# Altium PCB PCB_MCP_41x_453x.PcbDoc
Units mm, origin at the board's own origin, x right, y up, seen from the top; angles counter-clockwise.
Board outline 22.54 x 20.32 mm, 2 copper layers (Top Layer, Bottom Layer); 13 components, 9 nets, 50 pads, 3 vias.
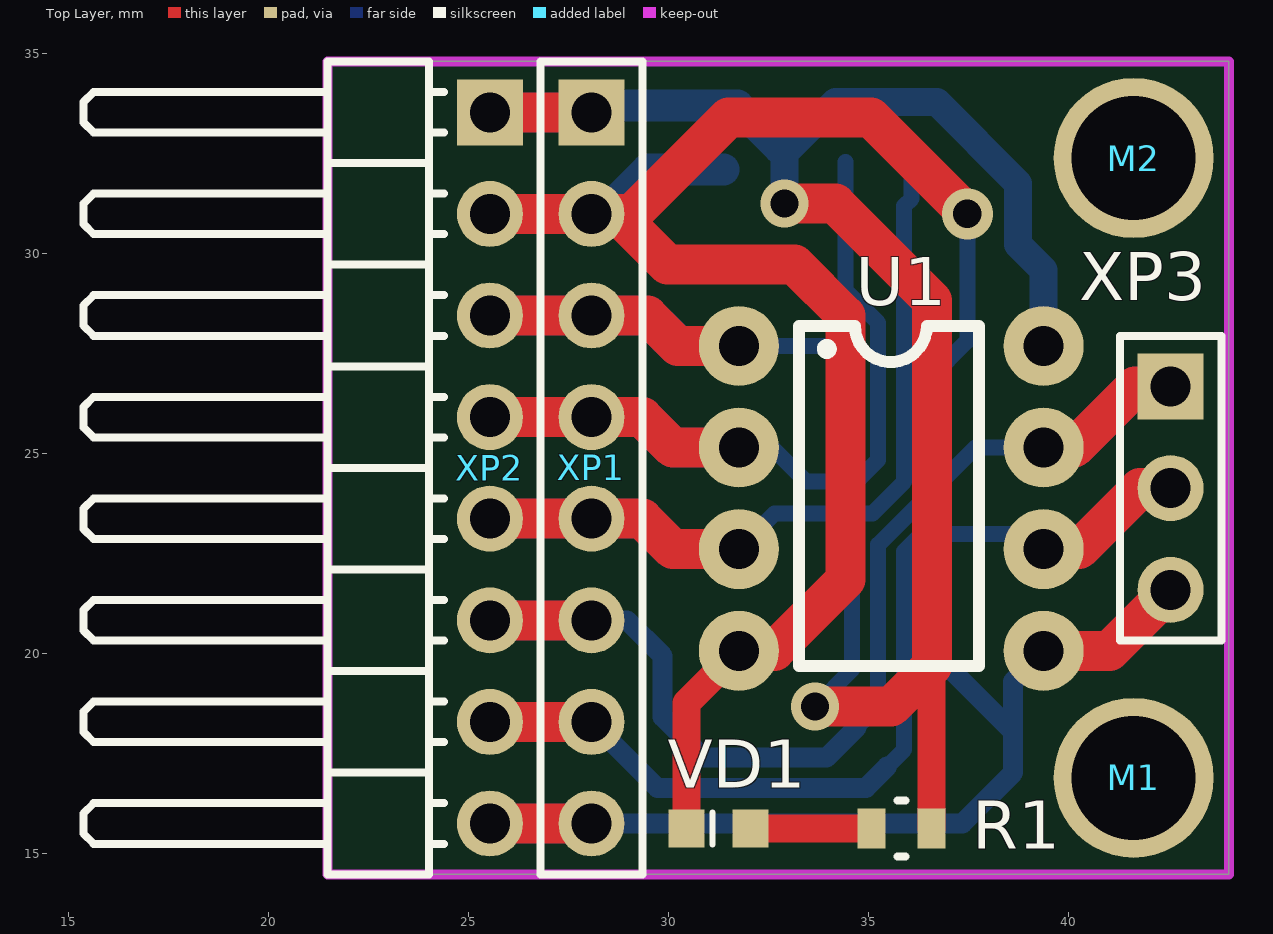
[diagram p0: Top Layer view]
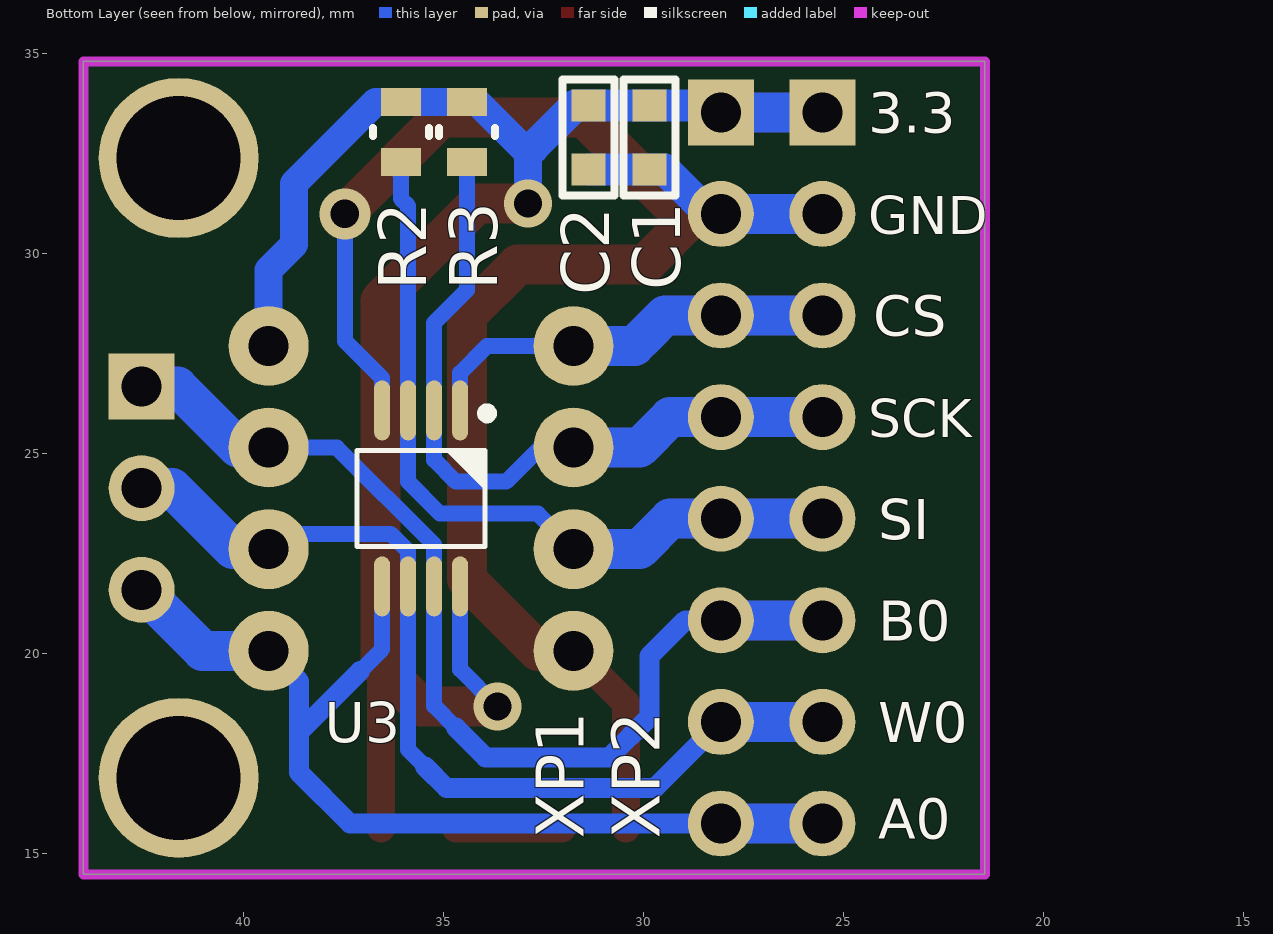
[diagram p1: Bottom Layer view, seen from below]

## Layer stack, top to bottom
Top Solder: solder mask 0.0102, Solder Resist, Dk 3.5
Top Layer: signal copper 0.0356
Dielectric 1: dielectric 0.32, FR-4, Dk 4.8
Bottom Layer: signal copper 0.0356
Bottom Solder: solder mask 0.0102, Solder Resist, Dk 3.5

## Board outline
21.463,14.478 21.463,34.798 44,34.798 44,14.478

## Design rules (kind name [scope] priority, off if disabled: settings)
Clearance [All] p1: gap=0.1 ignorepadtopadclearanceinfootprint=FALSE
HoleSize [All] p1: absolutevalues=TRUE maxlimit=5 minlimit=0.025 maxpercent=80.000 minpercent=20.000
HoleToHoleClearance [All] p1: gap=0.1 allowstackedmicrovias=TRUE
MinimumSolderMaskSliver [All] p1: minsoldermaskwidth=0.04
PolygonConnect [All] p1: connectstyle=Relief reliefconductorwidth=0.254 reliefentries=4 polygonreliefangle="90 Angle" airgapwidth=0.254
RoomDefinition SCH_MCP_41x_453x [InComponentClass('SCH_MCP_41x_453x')] p1: confinementstyle=ConfineIn formatcopy=TRUE lockcomponents=FALSE outline 182.499,26.162 186.436,26.162 186.436,28.829 182.499,28.829
RoutingVias [All] p1: holewidth=0.711 width=1.27 viastyle="Through Hole" minholewidth=0.711 minwidth=1.27 maxholewidth=0.711 maxwidth=1.27
SilkToSilkClearance [All] p1: silktosilkclearance=0.1
SilkToSolderMaskClearance [IsPad] p1: minsilkscreentomaskgap=0.1 clearancetoexposedcopper=TRUE
SolderMaskExpansion [All] p1: expansion=0.102
Width [All] p1: maxlimit=2 minlimit=0.254 preferedwidth=0.5
25 further rules are at their usual default settings.

## Components (designator, comment, footprint, x,y, rotation, side; value= is the part's Value field where it differs from the comment)
C1 "0.1uF" SMD0603-v3 29.845,32.893 r90 bottom
C2 "0.01uF" SMD0603-v3 31.369,32.893 r90 bottom
M1 "Mehanical_Pin" Mehanical_Pin 41.62,16.891 r0 top
M2 "Mehanical_Pin" Mehanical_Pin 41.62,32.385 r0 top
R1 "3.3k" SMD0603-v1 35.814,15.621 r0 top
R2 "4.7k" SMD0603-v1 36.068,33.032 r90 bottom
R3 "4.7k" SMD0603-v1 34.417,33.032 r90 bottom
U1 "MCP41xx_43xx" DIP-8_3D 31.75,27.686 r270 top locked
U3 "MCP4551" SOP65P490X109-8N 35.56,23.876 r270 bottom
VD1 "LED" LEDC1608X80N_G 31.242,15.621 r0 top
XP1 "PLS-08" PLS-08 28.067,33.528 r270 top
XP2 "PLS-08R" PLS-08R-LEFT 25.527,33.528 r270 top
XP3 "PLS-03" PLS-03 42.545,26.67 r270 top

## Footprints (in the part's own frame and the unit in brackets; to place one, negate y for a bottom-side part, rotate by r counter-clockwise, add the part's x,y. Pads: shape width x height; smd on the part's side, far side on the other; paste and mask are expansions set on the pad)
DIP-8_3D [mm] "Small Outline; 8 Leads; Body Width 3.9 mm; Pitch 1.27 mm"
  round 2 hole 1: 1(0,0) 2(2.54,0) 3(5.08,0) 4(7.62,0) 5(7.62,7.62) 6(5.08,7.62) 7(2.54,7.62) 8(0,7.62)
  silkscreen extent -0.5,1.5 8,6, body extent -1.14,-0.1 8.77,7.72, height 4.67
LEDC1608X80N_G [mm] "SMD LED GREEN"
  rect 0.9x0.95 smd: 1(-0.8,0) 2(0.8,0)
  silkscreen extent -0.15,-0.4 -0.15,0.4, body extent -0.9,-0.45 0.9,0.45, height 0.8
Mehanical_Pin [mm]
  round 4 hole 3.1: 0(0,0)
PLS-03 [mm] "Однорядный прямой штыревой соединитель типа PLS"
  rect 1.65x1.65 hole 1: 1(0,0)
  round 1.65 hole 1: 2(2.54,0) 3(5.08,0)
  silkscreen extent -1.27,-1.27 6.35,1.27, body extent -1.27,-1.27 6.35,1.27, height 8.64
PLS-08 [mm] "Однорядный прямой штыревой соединитель типа PLS"
  rect 1.65x1.65 hole 1: 1(0,0)
  round 1.65 hole 1: 2(2.54,0) 3(5.08,0) 4(7.62,0) 5(10.16,0) 6(12.7,0) 7(15.24,0) 8(17.78,0)
  silkscreen extent -1.27,-1.27 19.05,1.27, body extent -1.27,-1.27 19.05,1.27, height 8.64
PLS-08R-LEFT [mm] "Однорядный угловой штыревой соединитель PLS-xxR"
  rect 1.65x1.65 hole 1: 1(0,0)
  round 1.65 hole 1: 2(2.54,0) 3(5.08,0) 4(7.62,0) 5(10.16,0) 6(12.7,0) 7(15.24,0) 8(17.78,0)
  silkscreen extent -1.27,-10.16 19.05,-1.14, body extent -1.27,-10.22 19.05,0.25, height 3.1
SMD0603-v1 [mm] "Resistor SMD0603"
  rect 0.7x1 smd: 1(-0.75,0) 2(0.75,0)
  silkscreen extent -0.1,-0.7 0.1,0.7, body extent -0.8,-0.4 0.8,0.4, height 0.46
SMD0603-v3 [mm] "SMD0603"
  rect 0.8x0.85 smd: 1(-0.8,0) 2(0.8,0)
  silkscreen extent -1.45,-0.65 1.45,0.65, body extent -1,-0.39 1,0.39, height 0.8
SOP65P490X109-8N [mm] "SOP, 0.65mm pitch, 8 pin, Body 3.0x3.0x1.09mm LWH, IPC Medium Density"
  round 1 on Mech15: 0(0,0)
  oval 1.5x0.4 smd: 1(-2.2,0.975) 2(-2.2,0.325) 3(-2.2,-0.325) 4(-2.2,-0.975) 5(2.2,-0.975) 6(2.2,-0.325) 7(2.2,0.325) 8(2.2,0.975)
  silkscreen extent -2.25,-1.6 1.2,1.77, body extent -2.45,-1.5 2.45,1.5, height 1.1

## Part data
C1: library part SMD0603-0.1uF-50V, "??????????? ??????????", Manufacturer="Rohm Semiconductor", Power\Voltage=50?, Tolerance=±10%, Author=Sun, ComponentLink1Description=?????????, Component Type=Standard, DateModification=28.03.2015, Part Number=SMD0603-0.1uF-50V, SpecificationName=???????????, ????????? ????????=Y, ??????=SMD0603
C2: library part SMD0603-0.01uF-50V, "??????????? ??????????", Power\Voltage=50?, Author=Sun, ComponentLink1Description=?????????, Component Type=Standard, DateModification=09.10.2016, Part Number=SMD0603-0.01uF-50V, SpecificationName=???????????, ????????? ????????=Y, ??????=SMD0603
M1 M2: library part Mehanical_PIN, Part Number=Mehanical_PIN
R1: library part SMD0603-3.3k-1%, "???????? ??????????", Manufacturer="Rohm Semiconductor", Tolerance=1%, Author=Sun, ComponentLink1Description=?????????, ComponentLink2Description="???? ?????????????", ComponentLink2URL=http://www.royalohm.com/, Component Type=Standard, DateModication=12.10.2016, Part Number=SMD0603-3.3k-1%, SpecificationName=????????, ????????? ????????=Y, ??????=SMD0603
R2 R3: library part SMD0603-4.7k-1%, "???????? ??????????", Manufacturer="Rohm Semiconductor", Tolerance=1%, Author=Sun, ComponentLink1Description=?????????, ComponentLink2Description="???? ?????????????", ComponentLink2URL=http://www.royalohm.com/, Component Type=Standard, DateModication=12.10.2016, Part Number=SMD0603-4.7k-1%, SpecificationName=????????, ????????? ????????=Y, ??????=SMD0603
U1: "Digital Potentiometer with SPI or I2C Interface", Manufacturer=Microchip, Manufacturer_Part_Number=MCP41010T-E/SN, Copyright="Copyright (C) 2021 Ultra Librarian. All rights reserved.", DateModification=08.10.2021, ManufacturerPartNumber=MCP41xx_43xx, Mfr_Name=Microchip, Part Number=MCP41xx_43xx, RefDes=RefDes, SpecificationName=IC, Type=DEV, ??????=SOIC-8
U3: "Digital Potentiometer with I2C Interface, 257 steps, Memory type: RAM", Manufacturer=Microchip, Manufacturer_Part_Number=MCP4531-103E/MS, Copyright="Copyright (C) 2021 Ultra Librarian. All rights reserved.", DateModification=08.10.2021, ManufacturerPartNumber=MCP4551, Mfr_Name=Microchip, Part Number=MCP4551, RefDes=RefDes, SpecificationName=IC, Type=DEV, ??????=MSOP-8
VD1: library part LED-Avago-HSMG-C190_Green, "Surface mount LED green 20mA", Color=GREEN, Manufacturer Name=Avago, Manufacturer Part No.=HSMG-C190, ManufacturerPartNumber=LED-Avago-HSMG-C190_Green, Part Number=LED-Avago-HSMG-C190_Green
XP1 XP3: "?????????? ?????? ???????? ???????????", Manufacturer=BrownBear, Author=Gr., ComponentLink1Description=Parametrs, ComponentLink2Description=Site, ComponentLink2URL=http://www.brownbear.ru/, Component Type=Standard, DateModification=24.03.2011, SpecificationName=Connector, ????????? ????????=Y
  XP1: ManufacturerPartNumber=PLS-08, Part Number=PLS-08
  XP3: ManufacturerPartNumber=PLS-03, Part Number=PLS-03
XP2: "?????????? ??????? ???????? ???????????", Manufacturer=BrownBear, Author=Gr., ComponentLink1Description=Parametrs, ComponentLink2Description=Site, ComponentLink2URL=http://www.brownbear.ru/, Component Type=Standard, DateModification=24.03.2011, ManufacturerPartNumber=PLS-08R, Part Number=PLS-08R, SpecificationName=Connector, ????????? ????????=Y

## Via types
v1: diameter 1.2, hole 0.7, Top Layer to Bottom Layer, 2 vias
v2: diameter 1.27, hole 0.711, Top Layer to Bottom Layer, 1 vias

## Nets (pads, with @x,y where several pads share a name; then routed paths per layer and width w, separated by ;. In a path a pad name is that pad's centre, name@x,y a point inside that pad or via, vN(x,y) a via of type N, cw(c..) or ccw(c..) an arc to the next point about the centre after c; other vN are vias at no path point)
3.3V: C1.2 C2.2 R1.2 R2.2 R3.2 U1.8 U3.8 XP1.1 XP2.1 | length 47.7
  Top Layer w0.7: R1.2 36.564,19.673 36.576,19.685
  Top Layer w1: XP2.1 XP1.1 ; v1(32.893,31.242) 34.163,31.242 36.576,28.829 36.576,19.685 ; v1(33.655,18.669) 35.56,18.669 36.564,19.673
  Bottom Layer w0.4: v1(33.655,18.669) 34.585,19.599 U3.8
  Bottom Layer w0.7: v1(32.893,31.242) 32.893,32.512 34.163,33.782 R3.2 R2.2 36.703,33.782 38.735,31.75 38.735,30.226 39.37,29.591 U1.8
  Bottom Layer w0.8: XP1.1 28.232,33.693 C1.2 C2.2 31.712,33.693 32.766,32.639
  Bottom Layer w1: XP2.1 XP1.1
C\S\_(A0): U1.1 U3.1 XP1.3 XP2.3 | length 17.1
  Top Layer w1: XP2.3 XP1.3 29.464,28.448 30.226,27.686 U1.1
  Bottom Layer w0.4: U1.1 33.909,27.686 34.585,27.01 U3.1
  Bottom Layer w1: XP2.3 XP1.3 29.464,28.448 29.972,27.94 30.226,27.686 U1.1
GND: C1.1 C2.1 U1.4 U3.4 VD1.1 XP1.2 XP2.2 | length 47.3
  Top Layer w0.5: v2@37.338,31.115 v2(37.465,30.988)
  Top Layer w0.7: VD1.1 30.442,18.758 U1.4
  Top Layer w1: XP2.2 XP1.2 XP1.2@28.702,30.988 ; U1.4 32.639,20.066 34.417,21.844 34.417,28.448 33.147,29.718 29.972,29.718 XP1.2@28.702,30.988 ; v2@37.338,31.115 35.052,33.401 31.496,33.401 29.083,30.988 XP1.2@28.702,30.988
  Bottom Layer w0.4: U3.4 36.535,26.883 37.465,27.813 v2(37.465,30.988)
  Bottom Layer w0.8: XP1.2 28.359,30.988 29.464,32.093 C1.1 C2.1
  Bottom Layer w1: XP2.2 XP1.2
NetR1_1: R1.1 VD1.2 | length 2.6
  Top Layer w0.7: VD1.2 34.683,15.621
PA0: U1.5 U3.5 XP1.8 XP2.8 XP3.3 | length 32
  Top Layer w1: XP2.8 XP1.8 ; U1.5 41.021,20.066 XP3.3
  Bottom Layer w0.4: U3.5 36.535,20.107 37.084,19.558
  Bottom Layer w0.5: XP1.8 37.338,15.748 38.608,17.018 38.608,18.034 ; 37.084,19.558 38.608,18.034 ; U1.5 38.608,19.304 38.608,18.034
  Bottom Layer w1: XP2.8 XP1.8 ; U1.5 41.021,20.066 XP3.3 ; U1.5@39.37,20.32 U1.5@39.751,20.32
PB0: U1.7 U3.7 XP1.6 XP2.6 XP3.1 | length 32.1
  Top Layer w1: XP2.6 XP1.6 ; U1.7 40.132,25.146 41.656,26.67 XP3.1
  Bottom Layer w0.4: 34.69,18.142 35.235,18.688 U3.7 35.235,22.718 37.663,25.146 U1.7
  Bottom Layer w0.5: XP1.6 28.956,20.828 29.845,19.939 29.845,18.415 30.861,17.399 33.946,17.399 34.69,18.142 ; U1.7@39.243,25.273 U1.7@39.37,25.4
  Bottom Layer w1: XP2.6 XP1.6 ; U1.7 40.132,25.146 41.656,26.67 XP3.1
PW0: U1.6 U3.6 XP1.7 XP2.7 XP3.2 | length 30.4
  Top Layer w1: XP2.7 XP1.7 ; U1.6 40.259,22.606 41.783,24.13 XP3.2
  Bottom Layer w0.4: 35.457,17.169 35.885,17.597 U3.6 35.885,22.55 36.322,22.987 38.989,22.987 U1.6
  Bottom Layer w0.5: XP1.7 29.718,16.637 34.925,16.637 35.457,17.169
  Bottom Layer w1: XP2.7 XP1.7 ; U1.6 40.259,22.606 41.783,24.13 XP3.2
SCK_(SCL): R3.1 U1.2 U3.2 XP1.4 XP2.4 | length 25.6
  Top Layer w1: XP2.4 XP1.4 29.337,25.908 30.099,25.146 U1.2
  Bottom Layer w0.4: U1.2 32.584,25.146 33.437,24.293 34.69,24.293 35.235,24.838 U3.2 35.235,28.265 34.417,29.083 R3.1
  Bottom Layer w0.5: U1.2@31.75,25.019 U1.2@31.877,25.019 ; U1.2 U1.2@31.877,25.019 ; U1.2@32.131,24.765 U1.2@31.877,25.019
  Bottom Layer w1: XP2.4 XP1.4 29.337,25.908 30.099,25.146 U1.2
SI_(SDA): R2.1 U1.3 U3.3 XP1.5 XP2.5 | length 26.2
  Top Layer w1: XP2.5 XP1.5 29.337,23.368 30.099,22.606 U1.3
  Bottom Layer w0.4: U1.3 32.639,23.495 35.087,23.495 35.885,24.293 U3.3 35.885,31.186 36.068,31.369 R2.1
  Bottom Layer w0.5: R2.1 R2.1@36.195,32.155
  Bottom Layer w1: XP2.5 XP1.5 29.337,23.368 30.099,22.606 U1.3
pads on no net: M1.0 M2.0 U3.0

## Keep-outs
Keep-Out Layer:
  the board outline again, w0.25

## Silkscreen, mask and mechanical layers (free items; w line width, h text height)
Bottom Overlay:
  text "3.3" at 24.384,33.02 h1
  text "GND" at 24.384,30.48 h0.95
  text "CS" at 24.257,27.94 h1
  text "SCK" at 24.384,25.4 h0.95
  text "SI" at 24.13,22.86 h1
  text "B0" at 24.13,20.32 h1
  text "W0" at 24.13,17.78 h1
  text "A0" at 24.13,15.367 h1
Mechanical 15:
  lines w0.25: 5.43,7.874 61.68,7.874 61.68,46.482 5.43,46.482 5.43,7.874